# EAGLE board p3 (EAGLE 6.4)
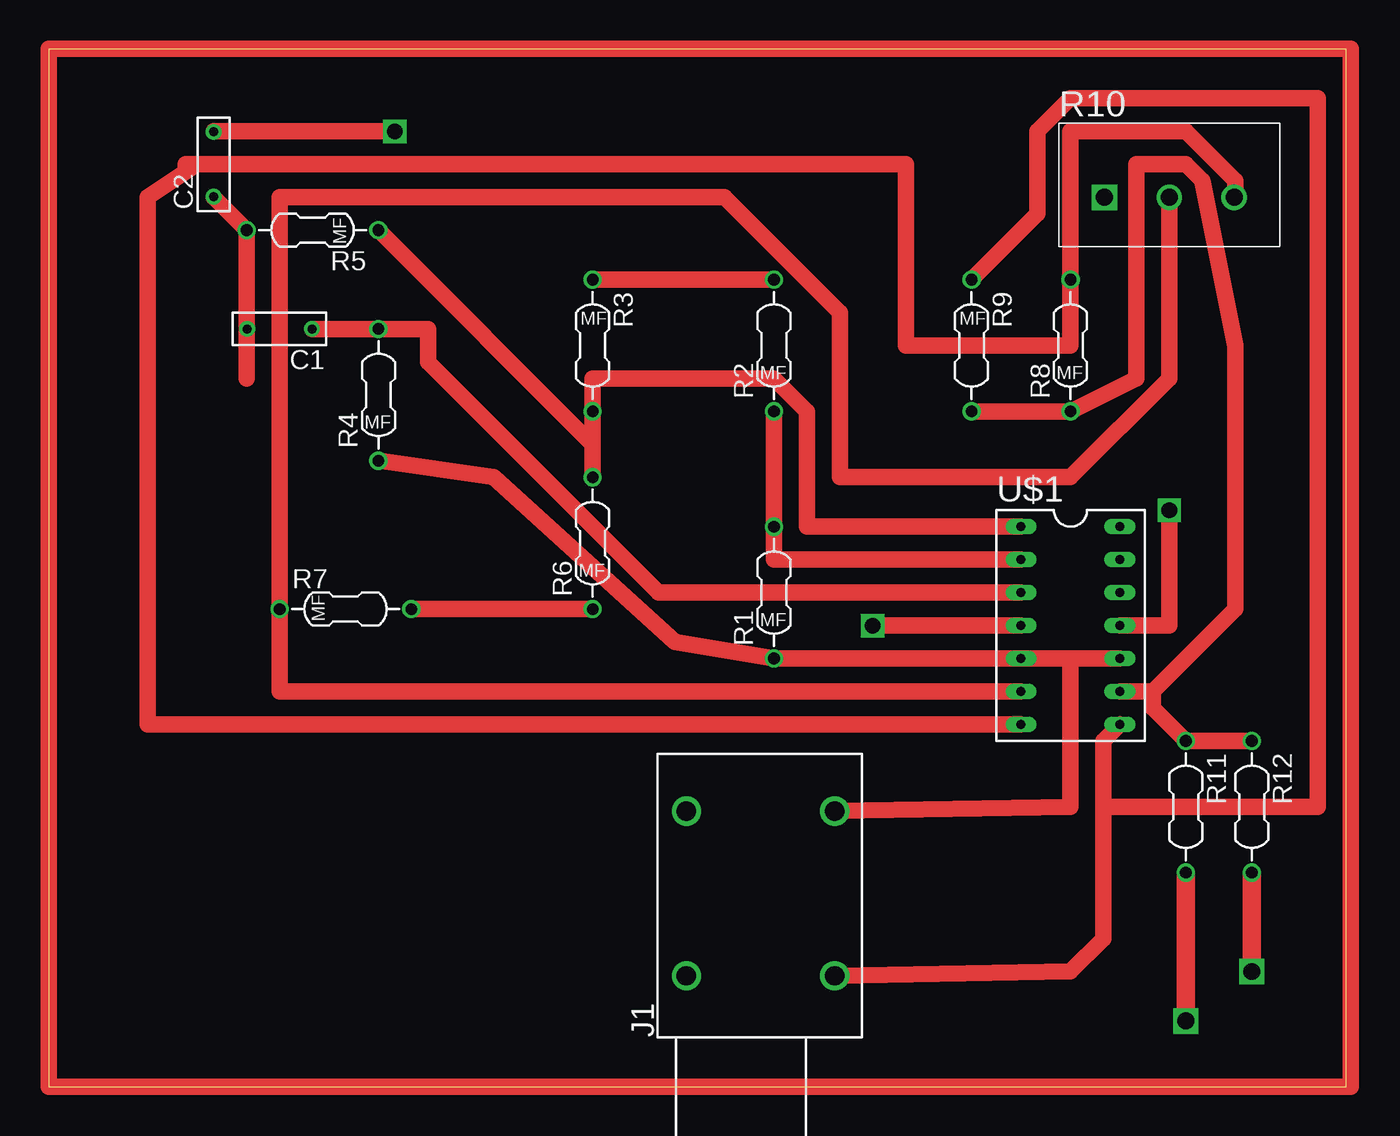
[diagram p0: board, top side]

Size 100 x 80 mm. Coordinates in mm from the lower left corner, seen from the top.
Outline: 0,0 100,0 100,80 0,80 0,0
Copper layers (1*16): Top 0.035mm / dielectric 1.5mm / Bottom 0.035mm
Design rules "default": minimum track width 10mil, minimum drill 24mil, track to track 8mil, track to pad 8mil, pad to pad 8mil, via to via 8mil, smd to smd 8mil, copper to edge 40mil, drill to drill 8mil, minimum pad ring 10mil, minimum via ring 8mil, stop-mask expansion 4mil, vias tented up to drill 0mil, thermal gap 10mil
Net classes: 0 default: width 1.27 mm, drill 1.27 mm, clearance 0.254 mm

## Footprints (pad centres in the part's own frame; a part is rotated, then mirrored left to right if it is on the bottom)
BOX-2.5MM-7.2MM = drill 0.7: P$1 -2.5,0; P$2 2.5,0
NEUTRIK-NRJ4HM-1 = drill 1.5: S 7.23,4.75; SN -4.2,4.75; T 7.23,17.45; TN -4.2,17.45
0.25W-0.4IN-METALFILM = drill 0.9: 1 -5.08,0; 2 5.08,0
POT-SIDE-16MM-BITECH-P160KN = drill 1.3 square: P$1 -5,3.8 | drill 1.3: P$2 0,3.8; P$3 5,3.8
0.25W-0.4IN = drill 0.9: 1 -5.08,0; 2 5.08,0
DIP14 = drill 0.7 long: 1 0,7.62; 2 0,5.08; 3 0,2.54; 4 0,0; 5 0,-2.54; 6 0,-5.08; 7 0,-7.62; 8 7.62,-7.62; 9 7.62,-5.08; 10 7.62,-2.54; 11 7.62,0; 12 7.62,2.54; 13 7.62,5.08; 14 7.62,7.62

## Placement (x,y rotation side)
C1  10n  [BOX-2.5MM-7.2MM]  17.78,58.42 180 top
C2  10n  [BOX-2.5MM-7.2MM]  12.7,71.12 90 top
J1  MONOSW1GND  [NEUTRIK-NRJ4HM-1]  53.34,3.81 0 top
R1  100k  [0.25W-0.4IN-METALFILM]  55.88,38.1 90 top
R2  56k  [0.25W-0.4IN-METALFILM]  55.88,57.15 90 top
R3  2.2k  [0.25W-0.4IN-METALFILM]  41.91,57.15 270 top
R4  5.6k  [0.25W-0.4IN-METALFILM]  25.4,53.34 90 top
R5  5.6k  [0.25W-0.4IN-METALFILM]  20.32,66.04 180 top
R6  100  [0.25W-0.4IN-METALFILM]  41.91,41.91 90 top
R7  100k  [0.25W-0.4IN-METALFILM]  22.86,36.83 0 top
R8  1k  [0.25W-0.4IN-METALFILM]  78.74,57.15 90 top
R9  1k  [0.25W-0.4IN-METALFILM]  71.12,57.15 270 top
R10  100k  [POT-SIDE-16MM-BITECH-P160KN]  86.36,64.77 0 top
R11  1k  [0.25W-0.4IN]  87.63,21.59 270 top
R12  1k  [0.25W-0.4IN]  92.71,21.59 270 top
U$1  OPAMP-QUADTL074  [DIP14]  74.93,35.56 0 top

## Library data of the parts
C1 C2 = Capacitors; SPICE: C{NAME} {1.NET} {2.NET} {VALUE}
J1 = Audio Jacks 0.25 inch
R1-R9 R11 R12 = Resistors; SPICE: R{NAME} {1.NET} {2.NET} {VALUE}
R10 = Potentiometers; PERCENT: 50; SPICE: R{NAME}CW {3.NET} {2.NET} {{{VALUE} - {{{ATTR.PERCENT} / 100} * {VALUE}}} + 0.001}\nR{NAME}CCW {2.NET} {1.NET} {{{{ATTR.PERCENT} / 100} * {VALUE}} + 0.001}
U$1 = Op Amps; SPICE: X{NAME}A {A.IN+.NET} {A.IN-.NET} {VCC.NET} {VEE.NET} {A.OUT.NET} TL074\nX{NAME}B {B.IN+.NET} {B.IN-.NET} {VCC.NET} {VEE.NET} {B.OUT.NET} TL074\nX{NAME}C {C.IN+.NET} {C.IN-.NET} {VCC.NET} {VEE.NET} {C.OUT.NET} TL074\nX{NAME}D {D.IN+.NET} {D.IN-.NET} {VCC.NET} {VEE.NET} {D.OUT.NET} TL074; SPICEMOD: .SUBCKT TL074 1 2 3 4 5\nC1 11 12 3.498E-12\nC2 6 7 15.00E-12\nDC 5 53 DX\nDE 54 5 DX\nDLP 90 91 DX\nDLN 92 90 DX\nDP 4 3 DX\nEGND 99 0 POLY(2) (3,0) (4,0) 0 .5 .5\nFB 7 99 POLY(5) VB VC VE VLP VLN 0 4.715E6 -5E6 5E6 5E6 -5E6\nGA 6 0 11 12 282.8E-6\nGCM 0 6 10 99 8.942E-9\nISS 3 10 DC 195.0E-6\nHLIM 90 0 VLIM 1K\nJ1 11 2 10 JX\nJ2 12 1 10 JX\nR2 6 9 100.0E3\nRD1 4 11 3.536E3\nRD2 4 12 3.536E3\nRO1 8 5 150\nRO2 7 99 150\nRP 3 4 2.143E3\nRSS 10 99 1.026E6\nVB 9 0 DC 0\nVC 3 53 DC 2.200\nVE 54 4 DC 2.200\nVLIM 7 8 DC 0\nVLP 91 0 DC 25\nVLN 0 92 DC 25\n.MODEL DX D(IS=800.0E-18)\n.MODEL JX PJF(IS=15.00E-12 BETA=270.1E-6 VTO=-1)\n.ENDS

## Nets
0: J1.T R1.1 R4.1 U$1.5 U$1.10
N$1: R1.2 R2.1 U$1.2
N$2: R2.2 R3.1
N$3: R3.2 R5.1 R6.2 U$1.1
N$4: R6.1 R7.2
N$5: R7.1 R10.P$2 U$1.6
N$6: R8.2 R10.P$3 U$1.7
N$7: R8.1 R9.2 R11.1 R12.1 U$1.9
N$8: J1.S R9.1 U$1.8
N$9: C1.P$1 R4.2 U$1.3
N$10: C1.P$2 C2.P$1 R5.2
N$11: C2.P$2
N$14: R11.2
N$15: R12.2
VCC: U$1.4
VEE: U$1.11

## Tracks (layer width: path | path; a pad name or v marks a point on that pad's centre or on a via)
0
  Top 1.27: R4.1 34.29,46.99 48.26,34.29 R1.1 U$1.5 78.74,33.02 | U$1.10 78.74,33.02 | 78.74,33.02 78.74,21.59 J1.T
N$1
  Top 1.27: U$1.2 55.88,40.64 R1.2 R2.1
N$2
  Top 1.27: R2.2 R3.1
N$3
  Top 1.27: U$1.1 58.42,43.18 58.42,52.07 55.88,54.61 41.91,54.61 R3.2 41.91,49.53 | 41.91,49.53 R6.2 | 41.91,49.53 R5.1
N$4
  Top 1.27: R6.1 R7.2
N$5
  Top 1.27: U$1.6 17.78,30.48 R7.1 17.78,68.58 52.07,68.58 60.96,59.69 60.96,46.99 78.74,46.99 86.36,54.61 R10.P$2
N$6
  Top 1.27: U$1.7 7.62,27.94 7.62,68.58 10.55,70.53 | 11.43,71.12 10.55,70.53 | R10.P$3 91.44,68.58 91.44,69.85 87.63,73.66 78.74,73.66 R8.2 78.74,57.15 66.04,57.15 66.04,71.12 10.55,71.12 10.55,70.53
N$7
  Top 1.27: 85.09,30.48 U$1.9 | 85.09,30.48 91.44,36.83 91.44,57.15 88.9,69.85 87.63,71.12 83.82,71.12 83.82,54.61 R8.1 R9.2 | 85.09,30.48 85.09,29.21 R11.1 R12.1
N$8
  Top 1.27: U$1.8 81.28,26.67 81.28,21.59 | 81.28,21.59 81.28,11.43 78.74,8.89 J1.S | R9.1 76.2,67.31 76.2,73.66 78.74,76.2 97.79,76.2 97.79,21.59 81.28,21.59
N$9
  Top 1.27: C1.P$1 R4.2 29.21,58.42 29.21,55.88 46.99,38.1 U$1.3
N$10
  Top 1.27: 15.24,58.42 C1.P$2 | 15.24,54.61 15.24,58.42 | 15.24,58.42 R5.2 12.7,68.58 C2.P$1
N$12
  Top 1.27: 0,80.01 100.33,80.01 100.33,0 0,0 0,80.01
N$13  (via drill 1.2)
  Top 1.27: 12.7,73.66 v26.67,73.66
N$14  (via drill 1.3)
  Top 1.422: R11.2 v87.63,5.08
N$15  (via drill 1.3)
  Top 1.422: R12.2 v92.71,8.89
VCC  (via drill 1.2)
  Top 1.27: U$1.4 v63.5,35.56
VEE  (via drill 1.2)
  Top 1.27: U$1.11 86.36,35.56 v86.36,44.45